# Altium PCB BABA03A.PcbDoc (part 2 of 2)
Units mm, origin at the board's own origin, x right, y up, seen from the top; angles counter-clockwise.
Board outline 201.01 x 71.02 mm, 2 copper layers (Top Layer, Bottom Layer); 178 components, 141 nets, 590 pads, 257 vias.
Unrouted connection lines stored in the file: 7.
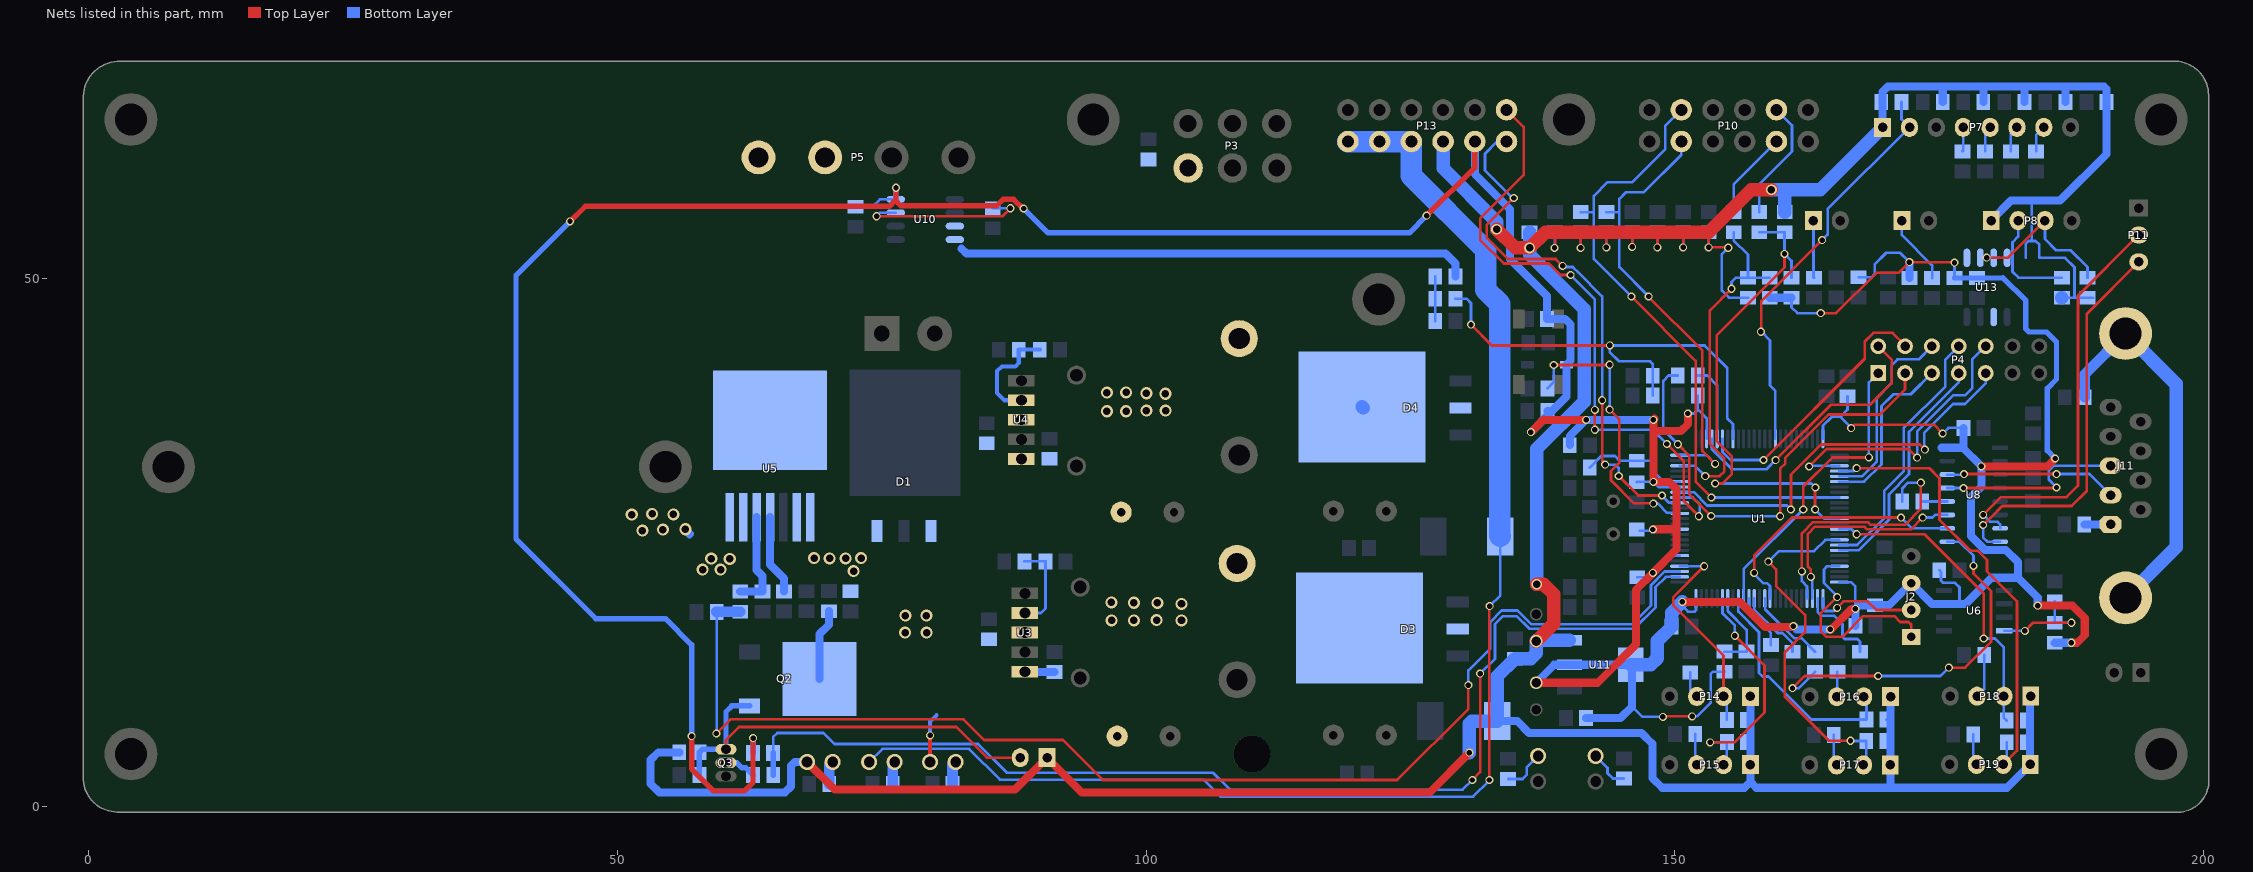
[diagram p2: the nets of this part, all layers, seen from the top]

## Via types
v1: diameter 0.762, hole 0.508, Top Layer to Bottom Layer, tented both sides, 213 vias
v2: diameter 1.143, hole 0.711, Top Layer to Bottom Layer, tented both sides, 35 vias
v3: diameter 1.016, hole 0.711, Top Layer to Bottom Layer, tented both sides, 9 vias

## Nets (pads, with @x,y where several pads share a name; then routed paths per layer and width w, separated by ;. In a path a pad name is that pad's centre, name@x,y a point inside that pad or via, vN(x,y) a via of type N, cw(c..) or ccw(c..) an arc to the next point about the centre after c; other vN are vias at no path point) (continued)
NetC51_2: C51.2 R41.1 U1.20 | length 10.4
  Bottom Layer w0.254: R41.1@141.971,32.094 143.049,33.172 144.353,33.172 144.795,32.73 C51.2@146.406,32.73 147.813,32.73 148.082,32.461 148.082,31.602 148.93,30.754 U1.20@150.463,30.754
NetD2_1: D2.1 R22.1 | length 4.2
  Bottom Layer w0.254: R22.1@134.239,2.642 135.611,2.642 135.992,3.023 135.992,3.719 D2.1@137.084,4.811
NetD3_2: D3.2 L1.1 U3.3
  other v2: 96.749,17.628 98.857,17.628 103.353,17.628 100.99,17.653 103.353,19.202 101.067,19.279 98.857,19.304 96.723,19.329
NetD4_2: D4.2 L2.1 U4.3 | length 0.1
  Bottom Layer w1.27: D4.2@120.421,37.823 D4.2@120.525,37.719
  other v2: 96.291,37.414 98.12,37.414 100.025,37.465 101.854,37.465 101.829,39.065 100.025,39.116 96.291,39.167 98.12,39.192
NetD5_2: D5.2 R16.2 | length 2.2
  Bottom Layer w1: R16.2@81.697,2.184 81.697,3.947 D5.2@81.991,4.242
NetD6_1: D6.1 R17.1 | length 3.9
  Bottom Layer w0.254: D6.1@142.519,4.811 143.637,3.693 143.637,3.175 144.14,2.672 R17.1@145.186,2.672
NetD9_2: D9.2 R24.2 | length 2.2
  Bottom Layer w1: R24.2@70.038,2.159 70.038,3.922 D9.2@70.358,4.242
NetD11_2: D11.2 R28.2 | length 2.1
  Bottom Layer w1: R28.2@76.032,2.184 76.032,4.049 D11.2@76.225,4.242
NetJ11_1: J11.1 R52.2 | length 2.5
  Bottom Layer w0.762: R52.2@188.732,26.708 J11.1@191.22,26.708
NetJ11_2: J11.2 U8.14 | length 16.4
  Top Layer w0.254: v1(177.358,31.471) v1(186.106,31.471) v1@186.258,31.471
  Bottom Layer w0.254: U8.14@175.772,31.42 177.307,31.42 v1(177.358,31.471) ; v1(186.106,31.471) 189.23,31.471 J11.2@191.22,29.481
NetJ11_3: J11.3 U8.13 | length 18.3
  Top Layer w0.254: v1(177.307,30.15) 186.055,30.15 v1(186.106,30.201)
  Bottom Layer w0.254: U8.13@175.772,30.15 v1(177.307,30.15) ; v1(186.106,30.201) 185.369,30.937 185.369,31.826 185.797,32.254 J11.3@191.22,32.254
NetJ11_10: J11.10 J11.11 R63.2 | length 36.6
  Bottom Layer w1.016: R63.2@188.783,38.735 188.783,40.908 J11.11@192.638,44.763
  Bottom Layer w1.27: J11.10@192.638,19.765 197.409,24.536 197.409,39.992 J11.11@192.638,44.763
NetP6_1: P6.1 R69.1 | length 5.4
  Bottom Layer w0.254: P6.1@163.119,55.448 163.119,50.099 R69.1@163.17,50.048
NetP7_4: P7.4 R70.1 | length 2.3
  Bottom Layer w0.254: R70.1@177.216,61.986 177.282,62.052 P7.4@177.282,64.262
NetP7_5: P7.5 R71.1 | length 2.5
  Bottom Layer w0.254: R71.1@179.349,61.986 179.349,63.79 P7.5@179.822,64.262
NetP7_6: P7.6 R72.1 | length 2.5
  Bottom Layer w0.254: R72.1@181.788,61.986 181.788,63.688 P7.6@182.362,64.262
NetP7_7: P7.7 R73.1 | length 2.6
  Bottom Layer w0.254: R73.1@184.175,61.986 184.175,63.536 P7.7@184.902,64.262
NetP8_2: P8.2 R54.2 U13.6 | length 10
  Bottom Layer w0.254: P8.2@182.474,55.448 182.474,53.924 181.933,53.384 181.933,50.605 182.49,50.048 R54.2@186.607,50.048
NetP8_3: P8.3 R56.2 U13.5 | length 16
  Top Layer w0.254: v1(179.502,51.943) 181.508,51.943 P8.3@185.014,55.448
  Bottom Layer w0.254: v1(179.502,51.943) 179.521,51.924 180.663,51.924 ; P8.3@185.014,55.448 185.014,53.696 186.08,52.629 187.452,52.629 189.027,51.054 R56.2@189.027,50.048
NetP9_1: P9.1 R74.1 | length 6.6
  Bottom Layer w0.254: P9.1@171.475,55.448 171.475,54.077 174.338,51.214 R74.1@174.338,50.016
NetP10_5: P10.5 R76.1 | length 8.3
  Bottom Layer w0.254: R76.1@155.575,56.246 155.575,58.872 P10.5@159.619,62.916
NetP10_8: P10.8 R77.2 | length 11.6
  Bottom Layer w0.254: R77.2@157.988,56.246 157.988,58.877 161.087,61.976 161.087,64.448 P10.8@159.619,65.916
NetP11_2: P11.2 U8.7 | length 38.5
  Top Layer w0.254: v1(179.172,27.61) 180.848,29.286 187.046,29.286 188.138,30.378 188.138,48.336 P11.2@193.878,54.077
  Bottom Layer w0.254: v1(179.172,27.61) 179.182,27.61 179.817,26.975 180.499,26.975 180.772,26.702 U8.7@180.772,26.34
NetP11_3: P11.3 U8.8 | length 37.8
  Top Layer w0.254: v1(179.172,26.65) 179.446,26.924 179.456,26.924 179.857,27.326 179.857,27.336 180.97,28.448 187.53,28.448 188.976,29.894 188.976,46.634 P11.3@193.878,51.537
  Bottom Layer w0.254: v1(179.172,26.65) 179.172,25.476 179.578,25.07 U8.8@180.772,25.07
NetP14_3: P14.3 R78.1 | length 2.5
  Bottom Layer w0.254: R78.1@151.46,12.715 151.46,11.049 P14.3@152.07,10.439
NetP15_3: P15.3 R80.1 | length 3
  Bottom Layer w0.254: R80.1@151.928,6.883 151.928,4.13 P15.3@152.07,3.988
NetP16_3: P16.3 R82.1 | length 2.4
  Bottom Layer w0.254: P16.3@165.329,10.414 165.379,10.465 R82.1@165.379,12.766
NetP17_3: P17.3 R84.1 | length 3
  Bottom Layer w0.254: R84.1@165.034,6.807 165.034,4.232 P17.3@165.303,3.962
NetP18_3: P18.3 R86.1 | length 4.2
  Bottom Layer w0.254: P18.3@178.587,10.465 179.258,11.135 R86.1@179.258,14.376
NetP19_3: P19.3 R88.1 | length 2.9
  Bottom Layer w0.254: R88.1@178.227,6.833 178.227,4.323 P19.3@178.537,4.013
NetQ2_3: Q2.3 R23.1 | length 6.8
  Bottom Layer w0.762: Q2.3@69.113,12.09 69.113,16.332 70.002,17.221 R23.1@70.002,18.506
NetQ3_2: Q3.2 R61.1 | length 3
  Bottom Layer w0.508: Q3.2@60.274,4.166 61.316,4.166 61.798,3.683 62.148,3.683 R61.1@62.834,2.997
NetR1_2: R1.2 U10.7 | length 16.6
  Top Layer w0.254: v1(74.524,55.855) 86.436,55.855 87.173,56.591 v1(87.173,56.612)
  Bottom Layer w0.254: v1(74.524,55.855) 74.854,56.185 U10.7@76.321,56.185 ; R1.2@85.496,56.612 v1(87.173,56.612)
NetR2_2: R2.2 R5.1 R7.1 | length 4.2
  Bottom Layer w0.254: R2.2@127.356,50.165 R5.1@127.356,48.057 127.356,45.954 R7.1@127.361,45.949
NetR13_2: R13.2 R14.1 U3.2 | length 8.6
  Bottom Layer w0.254: R14.1@88.494,23.216 R13.2@90.49,23.216 90.49,18.771 90.054,18.335 U3.2@88.544,18.335
NetR15_2: R15.2 R18.1 U4.2 | length 10.3
  Bottom Layer w0.381: U4.2@88.214,38.451 86.593,38.451 85.903,39.141 85.903,41.199 86.36,41.656 87.63,41.656 87.96,41.986 R18.1@87.96,43.231 R15.2@89.957,43.231
NetR20_1: R20.1 U8.12 | length 2.4
  Bottom Layer w0.254: R20.1@173.416,28.88 U8.12@175.772,28.88
NetR25_2: R25.2 R39.1 U1.94 | length 7.8
  Bottom Layer w0.254: R39.1@154.711,14.681 R25.2@156.794,14.681 156.794,16.739 155.013,18.519 U1.94@155.013,19.704
NetR26_2: R26.2 R27.2 U5.5 | length 9.4
  Bottom Layer w0.762: R26.2@61.62,20.356 R27.2@63.729,20.356 63.729,21.844 63.17,22.403 U5.5@63.17,27.404
NetR37_1: R37.1 U1.30 | length 7.3
  Bottom Layer w0.254: R37.1@152.182,40.792 153.086,40.792 154.013,39.865 U1.30@154.013,34.804
NetR58_1: R58.1 U8.9 | length 35.2
  Top Layer w0.254: v1(161.138,11.227) 162.281,12.37 v1(169.24,12.37) ; v1(175.92,13.157) 177.47,13.157 179.908,15.596 179.908,20.396 178.257,22.047 v1(178.257,22.784)
  Bottom Layer w0.254: v1(161.138,11.227) 161.732,11.227 R58.1@163.271,12.766 ; v1(169.24,12.37) 175.133,12.37 v1(175.92,13.157) ; U8.9@175.772,25.07 176.936,25.07 178.257,23.749 v1(178.257,22.784)
NetR89_2: R89.2 R90.1 U6.8 | length 10.2
  Top Layer w0.254: v1(183.109,16.649) 183.869,17.409 v1(187.503,17.409)
  Bottom Layer w0.254: U6.8@181.165,16.649 v1(183.109,16.649) ; R90.1@185.939,19.421 R89.2@185.939,17.409 v1(187.503,17.409)
NetR91_1: R91.1 U1.90 | length 5.3
  Bottom Layer w0.254: U1.90@157.013,19.704 157.013,18.526 159.09,16.45 R91.1@159.09,15.301
NetR92_1: R92.1 U1.89 | length 6.8
  Bottom Layer w0.254: U1.89@157.513,19.704 157.513,18.661 159.741,16.434 160.198,16.434 161.138,15.494 R92.1@161.138,14.666
NetR93_1: R93.1 U1.77 | length 8.1
  Bottom Layer w0.254: U1.77@163.513,19.704 163.513,18.427 163.855,18.085 165.049,18.085 165.862,17.272 165.862,16.078 166.065,15.875 167.259,15.875 167.513,15.621 R93.1@167.513,14.666
PC1: P13.6 U1.16 | length 51
  Top Layer w0.254: v1(134.772,57.582) 134.764,57.582 132.207,55.025 132.207,53.823 134.214,51.816 138.735,51.816 v1(139.395,51.156) ; v1(143.129,38.451) 143.129,32.647 v1(143.421,32.355) ; v1(144.704,31.293) 146.558,29.439 v1(148.793,29.439)
  Bottom Layer w0.254: P13.6@134.092,62.916 133.205,62.916 132.055,61.765 132.055,60.173 134.645,57.582 v1(134.772,57.582) ; v1(139.395,51.156) 139.497,51.054 140.358,51.054 140.434,50.978 140.441,50.978 140.843,50.576 140.843,50.569 143.129,48.283 v1(143.129,38.451) ; v1(143.421,32.355) 144.384,32.355 144.704,32.036 v1(144.704,31.293) ; v1(148.793,29.439) 149.478,28.754 U1.16@150.463,28.754
PC2: P13.7 U1.17 | length 59
  Top Layer w0.254: P13.7@134.092,65.916 135.712,64.296 135.712,59.741 131.597,55.626 131.597,53.619 133.833,51.384 138.1,51.384 139.192,50.292 v1(140.157,50.292) ; v1(142.443,35.662) v1(142.443,37.541) ; v1(149.25,34.315) 150.851,32.715 150.851,28.905 v1(152.273,27.483)
  Bottom Layer w0.254: v1(140.157,50.292) 140.157,50.277 142.443,47.991 v1(142.443,37.541) ; v1(142.443,35.662) 147.904,35.662 v1(149.25,34.315) ; U1.17@150.463,29.254 151.694,29.254 152.374,28.574 152.374,27.584 v1(152.273,27.483)
PG_L: R38.1 R64.1 R76.2 U1.23 | length 32.8
  Top Layer w0.254: v1(152.883,31.267) 154.229,31.267 154.686,31.725 154.686,32.964 153.314,34.336 153.314,46.939 v1(155.372,48.997)
  Bottom Layer w0.254: U1.23@150.463,32.254 151.896,32.254 v1(152.883,31.267) ; v1(155.372,48.997) 155.372,49.62 155.8,50.048 R38.1@156.921,50.048 ; R76.2@155.575,54.346 155.575,53.576 156.921,52.23 R38.1@156.921,50.048 ; R64.1@158.979,50.048 R38.1@156.921,50.048
PG_R: R42.2 R67.2 R77.1 U1.63 | length 47.4
  Top Layer w0.254: v1(153.822,30.582) 154.508,30.582 155.393,31.466 155.393,33.151 153.975,34.569 153.975,44.609 160.376,51.01 v1(160.376,52.299) ; v1(163.271,28.118) 163.271,30.175 v1(163.297,30.201)
  Bottom Layer w0.254: v1(153.822,30.582) 162.916,30.582 v1(163.297,30.201) ; R77.1@157.988,54.346 R42.2@160.401,54.346 160.376,54.32 v1(160.376,52.299) 161.036,51.638 R67.2@161.036,50.048 ; v1(163.271,28.118) 164.135,27.254 U1.63@165.563,27.254
PROFET_IN: R60.2 R61.2 U1.2 | length 109.5
  Top Layer w0.254: v1(130.861,2.54) 131.597,3.277 v1(131.597,12.598)
  Bottom Layer w0.254: R60.2@64.729,5.105 64.729,6.588 65.126,6.985 69.494,6.985 70.536,5.944 84.125,5.944 86.843,3.226 106.35,3.226 107.95,1.626 129.946,1.626 v1(130.861,2.54) ; v1(131.597,12.598) 132.994,13.995 132.994,17.272 133.756,18.034 135.052,18.034 136.246,16.84 146.164,16.84 148.184,18.859 148.184,20.776 149.162,21.754 U1.2@150.463,21.754
  Bottom Layer w0.508: R60.2@64.729,5.105 64.734,5.1 R61.2@64.734,2.997
PROFET_IS: C34.1 R26.1 U1.3 | length 121.8
  Top Layer w0.254: v1(59.36,6.934) 60.706,8.28 82.728,8.28 84.684,6.325 92.126,6.325 95.91,2.54 123.749,2.54 130.48,9.271 v1(130.48,11.506)
  Bottom Layer w0.254: v1(59.36,6.934) 59.395,6.97 C34.1@59.395,18.44 ; v1(130.48,11.506) 130.48,12.903 132.563,14.986 132.563,17.501 133.629,18.567 135.129,18.567 136.424,17.272 145.986,17.272 147.752,19.038 147.752,20.955 149.051,22.254 U1.3@150.463,22.254
  Bottom Layer w1: C34.1@59.36,18.456 R26.1@61.62,18.456
RELAY_IN: C7.1 C15.2 C16.2 C17.1 C36.2 D1.1 D1.3 P3.1 P5.4 U4.5 U5.1 U5.2 U5.6 U5.7
  other v2: 72.339,22.301 58.064,22.428 59.766,22.428 60.63,23.444 58.877,23.47 70.079,23.495 71.577,23.495 68.605,23.52 73.05,23.52
RELY: P12.2 Q2.1 Q3.3 R59.2 R62.1 | length 41.2
  Top Layer w0.254: Q3.3@60.274,5.436 60.274,6.325 61.493,7.544 82.067,7.544 84.963,4.648 P12.2@88.104,4.648
  Bottom Layer w0.508: R62.1@57.757,3.023 R59.2@57.757,5.156 58.036,5.436 Q3.3@60.274,5.436 60.274,8.992 60.833,9.55 Q2.1@62.509,9.55
RELY1: P4.9 U1.18 | length 38.9
  Top Layer w0.254: v1(160.985,28.118) 160.985,31.424 163.825,34.265 173.177,34.265 v1(173.66,33.782)
  Bottom Layer w0.254: U1.18@150.463,29.754 151.805,29.754 153.06,28.499 160.604,28.499 v1(160.985,28.118) ; v1(173.66,33.782) 173.584,33.858 173.584,35.357 176.327,38.1 177.444,38.1 179.4,40.056 P4.9@179.4,41.021
RELY2: P7.2 R36.2 U1.41 | length 38.5
  Top Layer w0.254: v1(158.14,44.933) 158.191,44.983 158.191,47.854 v1(163.932,53.594)
  Bottom Layer w0.254: v1@158.191,44.933 159.013,44.11 159.013,39.842 159.513,39.342 U1.41@159.513,34.804 ; v1(163.932,53.594) 164.465,54.127 164.465,56.525 P7.2@172.202,64.262 171.435,65.029 R36.2@171.435,66.65
RESET: R35.1 U1.14 | length 27.2
  Top Layer w0.254: v1(138.557,41.783) 143.815,41.783 v1(143.84,41.808) ; v1(143.84,37.567) 144.739,36.667 144.739,32.522 143.967,31.75 143.967,30.886 146.152,28.702 147.955,28.702 v1(147.98,28.677)
  Bottom Layer w0.254: R35.1@137.968,39.573 138.557,40.162 v1(138.557,41.783) ; v1(143.84,37.567) v1(143.84,41.808) ; v1(147.98,28.677) 148.399,28.677 149.276,27.799 150.418,27.799 U1.14@150.463,27.754
SPI1_MISO: P4.4 U1.31 | length 25.4
  Top Layer w0.254: v1(158.394,32.799) 167.97,42.375 167.97,44.018 168.783,44.831 170.613,44.831 171.78,43.664 P4.4@171.78,43.561
  Bottom Layer w0.254: U1.31@154.513,34.804 154.513,33.574 155.288,32.799 v1(158.394,32.799)
SPI1_MOSI: P4.1 U1.91 | length 28.6
  Top Layer w0.254: v1(162.154,28.118) 162.154,30.302 164.897,33.045 v1(168.351,33.045)
  Bottom Layer w0.254: U1.91@156.513,19.704 156.513,22.478 v1(162.154,28.118) ; v1(168.351,33.045) 168.351,40.132 P4.1@169.24,41.021
SPI1_NSS: P4.2 U1.29 | length 26.2
  Top Layer w0.254: v1(159.537,32.791) 164.77,38.024 168.453,38.024 170.51,40.081 170.51,42.291 P4.2@169.24,43.561
  Bottom Layer w0.254: U1.29@153.559,34.804 U1.29@153.513,34.804 153.513,33.807 155.393,31.928 158.674,31.928 v1(159.537,32.791)
SPI1_SCK: P4.3 R37.2 | length 44
  Top Layer w0.254: v1(150.292,34.29) 151.359,33.223 151.359,29.591 v1(153.441,27.508) ; v1(159.969,27.483) 159.969,31.98 160.452,32.463 160.452,33.02 164.541,37.109 169.414,37.109 171.78,39.476 P4.3@171.78,41.021
  Bottom Layer w0.254: R37.2@150.282,40.792 149.428,40.792 148.92,40.284 148.92,35.662 v1(150.292,34.29) ; v1(153.441,27.508) 153.467,27.483 v1(159.969,27.483)
SV_L: P10.2 R49.1 U1.25 | length 42.6
  Top Layer w0.254: v1(147.523,48.26) 147.523,48.235 152.603,43.155 152.603,33.655 v1(153.822,32.436)
  Bottom Layer w0.254: R49.1@143.535,56.246 144.739,56.246 144.755,56.261 ; v1(147.523,48.26) 147.523,48.285 144.755,51.054 144.755,56.261 ; U1.25@150.463,33.254 153.004,33.254 v1(153.822,32.436) ; P10.2@150.619,62.916 150.619,61.671 147.063,58.115 145.364,58.115 144.755,57.506 144.755,56.261
SV_R: P10.11 R53.2 U1.59 | length 59.4
  Top Layer w0.254: v1(145.898,48.26) 151.978,42.18 151.978,30.75 v1(153.467,29.261)
  Bottom Layer w0.254: R53.2@141.112,56.246 142.342,56.246 ; v1(145.898,48.26) 142.342,51.816 142.342,56.246 ; P10.11@150.619,65.916 149.098,64.395 149.098,62.179 145.974,59.055 143.612,59.055 142.342,57.785 142.342,56.246 ; v1(153.467,29.261) 153.473,29.254 U1.59@165.563,29.254
SYS_SWCLK: J2.2 U1.76 | length 10.2
  Top Layer w0.254: v1(165.354,18.821) 165.964,19.431 168.25,19.431 169.062,18.618 J2.2@172.364,18.618
  Bottom Layer w0.254: U1.76@164.013,19.704 164.013,18.689 164.186,18.517 165.049,18.517 v1(165.354,18.821)
SYS_SWDIO: J2.1 U1.72 | length 19.6
  Top Layer w0.254: v1(165.354,19.837) 163.805,18.288 163.805,16.637 164.363,16.078 165.862,16.078 167.818,18.034 170.764,18.034 171.323,17.475 172.11,17.475 172.364,17.221 J2.1@172.364,16.078
  Bottom Layer w0.254: v1(165.354,19.837) 165.354,19.939 164.109,21.184 164.109,22.454 164.41,22.754 U1.72@165.563,22.754
T_SENSE: P4.10 U1.53 | length 28
  Top Layer w0.254: v1(162.712,32.182) 164.363,33.833 172.11,33.833 v1(172.923,33.02)
  Bottom Layer w0.254: v1(162.712,32.182) 162.785,32.254 U1.53@165.563,32.254 ; v1(172.923,33.02) 172.923,35.509 176.327,38.913 177.47,38.913 178.13,39.573 178.13,42.291 P4.10@179.4,43.561
TRIG1: P14.2 R75.1 U1.4 | length 20.2
  Top Layer w0.254: v1(152.781,22.754) 149.86,19.833 149.86,19.05 154.61,14.3 P14.2@154.61,10.439
  Bottom Layer w0.254: U1.4@150.463,22.754 v1(152.781,22.754) ; P14.2@154.61,10.439 154.93,10.119 R75.1@154.93,8.23
TRIG2: P15.2 R79.1 U1.95 | length 22.6
  Top Layer w0.254: v1(153.34,6.096) 155.656,6.096 158.496,8.936 158.496,13.36 v1(155.677,16.18)
  Bottom Layer w0.254: v1(153.34,6.096) 153.365,6.121 R79.1@154.93,6.121 154.93,4.308 P15.2@154.61,3.988 ; U1.95@154.513,19.704 154.513,18.308 155.677,17.145 v1(155.677,16.18)
TRIG3: P16.2 R81.1 U1.92 | length 22.1
  Bottom Layer w0.254: U1.92@156.013,19.704 156.013,18.459 157.963,16.51 157.963,12.649 158.293,12.319 158.852,12.319 162.916,8.255 R81.1@168.128,8.255 168.128,10.155 P16.2@167.869,10.414
TRIG4: P17.2 R83.1 U1.67 | length 34.4
  Top Layer w0.254: v1(158.852,23.19) 159.589,22.453 159.589,20.895 162.331,18.153 162.331,16.52 160.401,14.59 160.401,10.414 164.567,6.248 v1(166.624,6.248)
  Bottom Layer w0.254: v1(158.852,23.19) 159.847,24.186 163.168,24.186 164.236,25.254 U1.67@165.563,25.254 ; v1(166.624,6.248) 166.649,6.223 R83.1@168.112,6.223 168.112,4.232 P17.2@167.843,3.962
TRIG5: P18.2 R85.1 U1.65 | length 29.7
  Top Layer w0.254: v1(167.208,25.781) 173.609,25.781 179.222,20.168 v1(179.222,15.926)
  Bottom Layer w0.254: U1.65@165.563,26.254 166.735,26.254 v1(167.208,25.781) ; v1(179.222,15.926) 180.289,15.926 181.127,15.088 P18.2@181.127,10.465 181.127,8.423 R85.1@181.397,8.153
TRIG6: P19.2 R87.1 U1.54 | length 43.2
  Top Layer w0.254: v1(167.208,32.029) 174.066,32.029 175.031,31.064 175.031,27.142 177.947,24.226 178.639,24.226 179.527,23.339 179.527,22.276 182.372,19.431 182.372,5.309 P19.2@181.077,4.013
  Bottom Layer w0.254: U1.54@165.563,31.754 166.933,31.754 v1(167.208,32.029) ; P19.2@181.077,4.013 181.397,4.333 R87.1@181.397,6.113
U_SENSE: C3.2 C4.2 R5.2 U1.33 | length 44.7
  Top Layer w0.254: v1(130.734,45.598) 132.695,43.637 v1(143.866,43.637)
  Bottom Layer w0.254: R5.2@129.256,48.057 130.302,48.057 130.734,47.625 v1(130.734,45.598) ; C4.2@147.914,38.887 C3.2@147.914,40.767 147.914,41.885 147.66,42.139 144.729,42.139 143.84,43.028 143.84,43.637 152.832,43.637 154.965,41.504 154.965,36.743 155.513,36.195 U1.33@155.513,34.804
UART4_RX: R20.2 U1.79 | length 24.5
  Top Layer w0.254: v1(162.013,22.276) 162.013,25.845 163.092,26.924 168.275,26.924 168.529,26.67 171.755,26.67 173.279,28.194 v1(173.279,30.658)
  Bottom Layer w0.254: v1(162.013,22.276) 162.013,21.349 162.513,20.849 U1.79@162.513,19.704 ; R20.2@171.516,28.88 171.516,30.114 172.06,30.658 v1(173.279,30.658)
UART4_TX: U1.78 U8.11 | length 20.4
  Top Layer w0.254: v1(162.865,21.754) 162.865,22.428 162.585,22.708 162.585,25.806 163.271,26.492 167.919,26.492 168.173,26.238 172.329,26.238 v1(173.446,27.356)
  Bottom Layer w0.254: v1(162.865,21.754) 163.013,21.606 U1.78@163.013,19.704 ; v1(173.446,27.356) 174.371,27.356 174.625,27.61 U8.11@175.772,27.61
USART1_RX: P4.7 U1.69 | length 22.5
  Bottom Layer w0.254: U1.69@165.563,24.254 167.359,24.254 170.256,27.152 170.256,29.559 172.161,31.464 172.161,35.458 176.86,40.157 P4.7@176.86,41.021
USART1_TX: P4.8 U1.68 | length 24.5
  Bottom Layer w0.254: U1.68@165.563,24.754 167.248,24.754 169.824,27.33 169.824,29.896 171.653,31.725 171.653,35.814 175.59,39.751 175.59,42.291 P4.8@176.86,43.561
USART2_RX: R58.2 U1.87 | length 7.4
  Bottom Layer w0.254: U1.87@158.513,19.704 158.559,19.659 158.559,18.684 161.291,15.951 161.986,15.951 R58.2@163.271,14.666
USART2_TX: U1.86 U8.10 | length 25.1
  Top Layer w0.254: v1(157.505,22.123) 157.505,23.774 161.087,27.356 v1(171.399,27.356)
  Bottom Layer w0.254: v1(157.505,22.123) 157.505,22 158.373,21.133 158.75,21.133 159.013,20.869 U1.86@159.013,19.704 ; v1(171.399,27.356) 172.415,26.34 U8.10@175.772,26.34
USART3_RX: P4.5 U1.56 | length 16.2
  Bottom Layer w0.254: U1.56@165.563,30.754 167.914,30.754 169.545,32.385 169.545,37.897 170.668,39.02 172.319,39.02 P4.5@174.32,41.021
USART3_TX: P4.6 U1.55 | length 18.4
  Bottom Layer w0.254: U1.55@165.563,31.254 167.703,31.254 169.113,32.664 169.113,38.684 170.51,40.081 170.51,41.758 171.069,42.316 173.076,42.316 P4.6@174.32,43.561
VCC_3V3: C1.1 C2.1 C8.2 C9.2 C20.1 C25.1 C26.1 C27.1 C29.2 C30.1 C38.2 C47.1 C48.1 C52.1 D8.2 J2.3 P13.5 R30.2 R39.2 R40.2 R46.2 R47.2 R50.2 R51.2 R60.1 R64.2 R67.1 R89.1 U1.6 U1.11 U1.19 U1.28 U1.50 U1.75 U1.100 U6.3 U8.16 U10.8 U11.2 U11.4 U13.2 | length 491.6
  Top Layer w0.254: v1(148.869,8.509) 148.92,8.56 v1(151.638,8.56) ; v1(163.805,46.685) 165.252,46.685 169.062,50.495 171.171,50.495 v1(172.187,51.511) 176.403,51.511 v1(176.454,51.46) ; v1(166.68,35.814) 167.011,36.144 174.498,36.144 v1(175.336,35.306)
  Top Layer w0.508: v1(45.517,55.372) 45.542,55.372 46.965,56.794 75.717,56.794 76.352,57.429 ; v1(57.028,6.679) 57.028,3.576 59.106,1.499 62.027,1.499 62.834,2.305 62.834,6.496 v1(62.84,6.502) ; v1(76.352,58.547) 76.352,57.429 ; v1(88.417,56.591) 88.343,56.591 87.479,57.455 86.487,57.455 85.877,56.845 76.784,56.845 76.352,57.277 76.352,57.429 ; v1(126.543,55.905) 131.092,60.455 P13.5@131.092,62.916
  Top Layer w0.762: v1(136.398,35.433) 137.592,36.627 137.617,36.601 v1(141.615,36.601) ; C30.1@136.896,11.735 142.712,11.735 146.329,15.352 146.329,20.523 v1(147.93,22.123) 150.165,24.359 150.165,26.254 ; v1(147.93,26.223) 147.961,26.254 150.165,26.254 ; v1@148.082,36.703 v1(147.98,36.601) 147.98,35.509 ; v1(150.724,19.38) 156.159,19.38 158.521,17.018 161.138,17.018 v1(161.214,17.094) ; v1(151.244,37.196) 151.244,36.182 150.597,35.535 148.006,35.535 147.98,35.509 ; v1(164.694,16.789) 164.798,16.789 166.728,18.72 v1(167.081,18.72) ; v1(178.994,32.207) 185.242,32.207 v1(185.979,32.944) ; v1(184.328,19.025) 187.615,19.025 188.773,17.866 188.773,16.231 188.062,15.519 v1(187.503,15.519) ; 147.98,35.509 v1(147.98,30.734) 149.482,30.734 150.165,30.051 150.165,26.254
  Bottom Layer w0.254: C9.2@72.517,56.754 74.127,56.754 74.828,57.455 U10.8@76.321,57.455 ; U11.4@145.841,13.437 U11.4@145.974,13.304 ; 145.974,9.5 146.964,8.509 v1(148.869,8.509) ; C52.1@146.406,30.704 146.435,30.734 v1(147.98,30.734) 148.46,30.254 U1.19@150.463,30.254 ; C20.1@146.456,21.702 147.508,21.702 v1(147.93,22.123) 149.56,23.754 U1.6@150.463,23.754 ; C27.1@146.71,26.121 v1@147.889,26.121 ; v1(147.93,26.223) 147.961,26.254 U1.11@150.463,26.254 ; v1(150.724,19.38) 150.724,18.989 151.257,18.456 151.872,18.456 152.013,18.597 U1.100@152.013,19.704 ; v1(151.244,37.196) 151.824,37.196 152.182,37.553 152.182,37.582 ; v1(151.638,8.56) 152.121,8.56 153.391,9.83 153.391,12.545 153.627,12.781 R39.2@154.711,12.781 ; C1.1@152.182,38.887 152.182,37.582 ; U1.28@153.013,34.804 153.013,36.75 152.182,37.582 ; R67.1@161.036,48.148 161.036,47.244 161.595,46.685 v1(163.805,46.685) ; U1.50@164.013,34.804 164.013,36.048 164.846,36.881 165.659,36.881 ; U1.75@165.563,21.254 166.68,21.254 167.081,20.853 v1@167.081,18.745 ; C2.1@166.345,38.826 166.345,37.567 165.659,36.881 ; v1(166.68,35.814) 166.68,35.859 165.659,36.881 ; R46.2@167.386,50.074 168.615,50.074 168.91,50.368 168.91,51.308 170.002,52.4 171.298,52.4 v1(172.187,51.511) ; C8.2@175.021,22.377 175.184,22.215 175.184,21.387 175.392,21.178 176.51,21.178 176.921,20.767 176.921,19.467 176.644,19.189 ; v1(175.336,35.306) 175.87,35.839 C38.2@177.307,35.839 ; R51.2@176.454,50.031 v1(176.454,51.46)
  Bottom Layer w0.508: v1(45.517,55.372) 40.411,50.267 40.411,25.349 47.955,17.805 54.538,17.805 57.028,15.315 v1(57.028,6.679) ; R60.1@62.829,5.105 62.84,5.116 v1(62.84,6.502) ; U10.8@76.321,57.455 76.321,58.516 v1(76.352,58.547) ; v1(88.417,56.591) 90.729,54.28 124.917,54.28 v1(126.543,55.905) ; R51.2@176.454,50.031 R51.2@176.472,50.013 R50.2@178.58,50.013 181.026,50.013 181.044,50.031 183.203,47.872 183.203,45.194 183.49,44.907 185.166,44.907 186.106,43.967 186.106,40.437 185.242,39.573 185.242,33.68 v1(185.979,32.944)
  Bottom Layer w0.762: P13.5@131.092,62.916 131.092,59.84 134.417,56.515 134.417,51.816 137.919,48.314 C47.1@137.919,46.126 139.64,46.126 140.157,45.609 140.157,42.198 D8.2@139.768,41.808 139.768,38.803 R30.2@138.405,37.44 ; v1(136.398,35.433) R30.2@138.405,37.44 ; C30.1@136.896,11.735 138.598,13.437 U11.2@140.041,13.437 U11.4@145.841,13.437 ; R30.2@137.958,37.44 R30.2@138.405,37.44 ; R40.2@140.076,34.202 140.076,35.062 v1(141.615,36.601) v1(147.98,36.601) ; C29.2@141.615,8.407 144.882,8.407 145.974,9.5 U11.4@145.974,13.304 ; R64.2@158.979,48.148 R67.1@161.036,48.148 ; v1(161.214,17.094) 161.519,16.789 v1(164.694,16.789) ; C48.1@167.086,17.12 167.081,17.125 v1(167.081,18.72) 167.081,18.745 167.401,19.065 C25.1@168.935,19.065 170.271,19.065 J2.3@172.364,21.158 174.333,19.189 U6.3@175.451,19.189 176.644,19.189 177.482,19.189 179.959,21.666 182.448,21.666 ; v1(172.187,51.511) 172.212,51.486 R47.2@172.212,50.023 ; U8.16@175.235,33.96 U8.16@175.772,33.96 177.241,33.96 ; C38.2@177.307,35.839 177.307,34.026 177.241,33.96 ; v1(184.328,19.025) 184.328,19.787 182.448,21.666 ; R89.1@185.939,15.509 185.95,15.519 v1(187.503,15.519) ; 177.241,33.96 v1(178.994,32.207) 178.994,30.277 178.003,29.286 178.003,25.629 179.346,24.286 181.302,24.286 182.448,23.139 182.448,21.666
  Bottom Layer w1.27: U11.4@145.841,13.437 147.726,13.437 148.361,14.072 148.361,15.702 C26.1@149.702,17.043 149.702,18.359 v1(150.724,19.38)
VCC_5V: C31.1 C32.2 D9.1 P7.1 P8.1 P12.1 P13.4 P14.1 P15.1 P16.1 P17.1 P18.1 P19.1 R9.1 R29.1 R31.1 R32.1 R33.1 R34.1 R36.1 R38.2 R42.1 R43.2 R44.1 R45.2 R48.1 R49.2 R53.1 R54.1 R55.2 R56.1 R57.1 R59.1 R75.2 R79.2 R81.2 R83.2 R85.2 R87.2 U11.3 U13.7 U13.8 | length 384.7
  Top Layer w0.254: v1(138.633,52.857) 138.684,52.908 138.684,54.356 ; v1(141.097,52.857) 141.097,54.331 141.122,54.356 ; v1(143.535,52.908) 143.535,54.356 ; v1(145.974,52.959) 145.974,54.356 ; v1(148.361,52.908) 148.361,54.356 ; 150.782,54.356 150.8,54.338 v1(150.8,52.908) ; 153.203,54.356 v1(153.203,52.908) 154.936,52.908 155.06,52.784 v1(155.06,52.873)
  Top Layer w0.762: D9.1@67.945,4.242 70.561,1.626 87.622,1.626 P12.1@90.644,4.648 93.921,1.372 126.822,1.372 v1(130.581,5.131)
  Top Layer w1.27: v3(133.147,54.635) 134.925,52.857 v3(136.271,52.857) 137.77,54.356 138.684,54.356 141.122,54.356 143.535,54.356 145.974,54.356 148.361,54.356 150.782,54.356 153.203,54.356 153.213,54.346 157.236,58.369 v3(159.142,58.369) ; C31.1@136.896,15.672 138.557,17.333 138.557,20.091 137.592,21.057 v3(136.957,21.057)
  Bottom Layer w0.254: v1(138.633,52.857) 138.659,52.883 R55.2@138.659,54.346 ; v1(141.097,52.857) 141.112,52.873 R53.1@141.112,54.346 ; v1(143.535,52.908) R49.2@143.535,54.346 ; v1(145.974,52.959) R48.1@145.974,54.346 ; v1(148.361,52.908) R45.2@148.361,54.346 ; v1(150.8,52.908) R44.1@150.8,54.346 ; v1(153.203,52.908) 153.213,52.918 R43.2@153.213,54.346 ; v1(155.06,52.873) 154.457,52.27 154.457,48.819 155.128,48.148 R38.2@156.921,48.148 ; R81.2@170.012,8.24 R81.2@170.028,8.255 ; P16.1@170.383,10.389 P16.1@170.409,10.414 ; 183.203,51.924 183.203,53.257 183.464,53.518 183.769,53.518 ; 183.769,57.328 183.769,53.518 ; R54.1@186.617,48.138 187.757,48.138 ; R56.1@189.586,48.138 187.757,48.138 ; 183.769,53.518 184.125,53.518 184.473,53.169 184.473,51.924 186.913,51.924 187.808,51.029 187.808,48.189 187.757,48.138
  Bottom Layer w0.762: R59.1@55.857,5.156 53.873,5.156 53.137,4.42 53.137,2.184 53.975,1.346 65.837,1.346 66.421,1.93 66.421,3.886 66.777,4.242 D9.1@67.945,4.242 ; R9.1@133.223,8.103 135.103,8.103 136.22,6.985 146.863,6.985 147.879,5.969 147.879,2.743 148.819,1.803 156.591,1.803 157.15,2.362 ; P14.1@157.15,10.439 P15.1@157.15,3.988 157.15,2.362 ; P7.1@169.662,64.262 169.662,67.63 170.155,68.123 175.362,68.123 ; P16.1@170.383,10.389 P17.1@170.383,3.962 170.383,1.829 170.358,1.803 ; R34.1@175.346,66.65 175.346,68.108 175.362,68.123 ; R33.1@179.182,66.65 179.182,68.087 179.146,68.123 ; P8.1@179.934,55.448 181.813,57.328 183.769,57.328 186.436,57.328 190.83,61.722 R29.1@190.83,66.65 190.83,67.869 190.576,68.123 186.995,68.123 ; R32.1@183.068,66.65 183.068,68.113 183.058,68.123 ; P18.1@183.667,10.465 183.617,10.414 P19.1@183.617,4.013 181.407,1.803 170.358,1.803 ; R31.1@186.944,66.65 186.944,68.072 186.995,68.123 ; 157.15,2.362 157.709,1.803 170.358,1.803 ; 175.362,68.123 179.146,68.123 ; 179.146,68.123 183.058,68.123 ; 183.058,68.123 186.995,68.123
  Bottom Layer w1.27: P13.4@128.092,62.916 128.092,60.376 133.147,55.321 v3(133.147,54.635) ; v1(130.581,5.131) 130.581,7.874 130.81,8.103 R9.1@133.223,8.103 133.223,12.344 C32.2@134.889,14.011 136.388,14.011 136.896,14.519 C31.1@136.896,15.672 136.961,15.737 U11.3@140.041,15.737 ; R57.1@136.271,54.346 v3(136.271,52.857) 136.271,52.222 141.427,47.066 141.427,38.328 136.957,33.858 v3(136.957,21.057) ; v3(159.142,58.369) 163.769,58.369 P7.1@169.662,64.262 ; R42.1@160.401,56.246 160.401,58.09 ; R54.1@186.607,48.148 R54.1@186.617,48.138
VCC_12V: D11.1 P13.1 P13.2 P13.3 R12.1 | length 132
  Top Layer w0.254: v1(132.461,2.54) 132.461,18.948 v1(132.486,18.974)
  Bottom Layer w0.254: D11.1@73.812,4.242 75.057,5.486 83.261,5.486 86.182,2.565 105.435,2.565 107.036,0.965 130.937,0.965 132.461,2.489 v1(132.461,2.54) ; v1(132.486,18.974) 133.502,19.99 R12.1@133.502,25.578
  Bottom Layer w2.032: P13.1@119.092,62.916 P13.2@122.092,62.916 P13.3@125.092,62.916 125.092,59.667 132.105,52.654 132.105,48.903 133.436,47.573 133.436,25.644 R12.1@133.502,25.578
VCC_24V: C10.1 C11.2 C12.2 C33.2 D5.1 P5.3 R2.1 U3.5 U5.4 U5.8 U10.3 U10.4 | length 63.6
  Top Layer w0.381: D5.1@79.578,4.242 79.654,4.318 79.578,4.394 v1(79.578,6.756)
  Bottom Layer w0.381: v1(79.578,6.756) 79.578,8.052 80.188,8.661
  Bottom Layer w0.762: 56.82,25.781 56.845,25.806 ; U5.4@64.44,27.404 64.44,22.911 65.761,21.59 C33.2@65.761,20.366 ; 82.563,52.781 83.02,52.324 128.321,52.324 129.256,51.389 R2.1@129.256,50.165 ; U3.5@88.544,12.741 C12.2@91.338,12.741
  other v2: 77.216,16.485 79.248,16.485 77.241,18.085 79.223,18.085 52.375,26.121 54.305,26.213 56.439,26.254 51.359,27.635 55.296,27.661 53.289,27.711
pads on no net: J11.4 J11.6 J11.7 J11.8 J11.9 M1.1 M1.2 M2.1 M2.2 U1.1 U1.7 U1.15 U1.26 U1.42 U1.57 U1.58 U1.71 U1.80 U1.83 U1.84 U1.85 U1.88 U6.5 U10.6

## Polygon pours and split planes (outlines as drawn)
GND on Bottom Layer "Keep-Out Layer-No Net" (solid, pour order 46): 99.441,62.484 99.441,63.83 100.119,64.508 103.784,68.174 166.827,68.174 167.615,67.386 167.615,64.16 167.335,63.881 161.239,57.785 137.084,57.785 134.315,57.785 107.365,57.785 99.72,57.785 99.492,58.014 99.441,58.064 99.441,62.469
GND on Bottom Layer "Keep-Out Layer-No Net" (solid, pour order 44): 84.43,17.069 83.795,17.069 82.423,18.44 82.423,20.904 82.702,21.184 83.273,21.754 88.163,21.754 89.701,21.754 89.891,21.565 89.891,19.583 89.814,19.507 86.917,19.507 86.794,19.385 85.954,18.544 85.954,18.313 85.954,17.069 84.455,17.069
BATTIN on Bottom Layer "Keep-Out Layer-No Net" (solid, pour order 40): 83.82,55.855 79.096,55.855 78.791,56.159 78.791,62.469 79.451,63.129 79.695,63.373 82.55,63.373 83.16,63.373 85.979,60.554 85.979,58.826 85.598,58.445 85.344,58.191 84.328,58.191 84.15,58.014 84.15,57.252 84.15,56.185 83.82,55.855
RELAY_IN on Bottom Layer "Keep-Out Layer-No Net" (solid, pour order 38): 56.21,19.765 60.202,19.765 60.554,20.117 60.554,21.133 61.087,21.666 61.189,21.666 57.15,21.666 56.49,21.006 56.21,20.726
RELAY_IN on Bottom Layer "Keep-Out Layer-No Net" (solid, pour order 34): 82.626,28.854 83.134,28.854 83.49,29.21 83.49,34.696 83.769,34.976 83.871,35.077 85.776,35.077 85.979,35.077 86.208,34.849 86.208,33.96 86.436,33.731 86.563,33.604 91.745,33.604 91.923,33.426 91.923,32.512 91.923,31.801 94.259,29.464 98.73,29.464 99.695,28.499 99.695,25.781 99.085,25.171 99.004,25.09 85.065,25.09 84.145,25.09 83.414,24.359 83.287,24.486 82.423,24.486 82.423,28.651 82.626,28.854
NetC13_2 on Bottom Layer "Keep-Out Layer-No Net" (solid, pour order 32): 105.994,14.884 112.116,14.884 112.471,14.529 112.471,11.811 113.36,10.922 128.499,10.922 129.108,10.312 129.261,10.16 129.261,7.722 129.261,5.994 128.575,5.309 124.841,5.309 124.13,6.02 124.13,7.696 123.622,8.204 121.641,8.204 121.056,8.204 120.015,7.163 119.71,6.858 119.71,3.353 119.71,2.134 119.71,2.311 117.678,2.311 115.214,2.311 113.716,3.81 113.716,6.452 112.217,7.95 110.033,7.95 106.909,7.95 105.588,9.271 105.613,9.296 105.613,14.376 105.613,14.503
RELAY_IN on Bottom Layer "Keep-Out Layer-No Net" (solid, pour order 28): 41.732,28.804 41.732,25.806 47.523,20.015 47.773,19.765 53.391,19.765 56.21,19.765 58.496,22.047 57.074,23.47 50.241,23.47 44.907,28.804
VCC_24V on Bottom Layer "Keep-Out Layer-No Net" (solid, pour order 26): 72.542,52.553 71.831,52.553 71.095,53.289 71.095,57.531 71.095,57.785 72.542,59.233 72.542,62.357 71.476,63.424 68.275,63.424 67.843,62.992 67.056,62.205 67.056,61.29 67.056,60.681 64.643,58.268 48.26,41.885 48.26,37.795 58.141,37.795 70.612,50.267 72.542,52.197
RELAY_IN on Bottom Layer "Keep-Out Layer-No Net" (solid, pour order 22): 105.969,60.604 105.969,61.57 105.664,61.874 99.695,61.874 97.663,61.874 96.774,60.985 93.65,60.985 90.272,64.364 86.741,67.894 77.013,67.894 60.477,67.894 46.558,53.975 41.732,49.149 41.732,43.358 41.732,28.804 49.086,21.45 61.557,21.45 61.671,21.565 62.255,22.149 62.255,30.127 62.255,30.178 59.337,30.178 58.699,29.54 58.699,24.613 58.166,24.079 57.988,23.901 56.236,23.901 50.775,23.901 47.574,27.102 47.574,42.494 55.397,50.317 66.065,60.985 66.065,62.89 67.234,64.059 73.609,64.059 83.21,64.059 86.69,60.579 91.719,55.55 98.4,55.55 103.911,55.55 105.969,57.607 105.969,60.579
RELAY_IN on Bottom Layer "Keep-Out Layer-No Net" (solid, pour order 20): 66.573,29.722 66.573,30.204 67.234,30.204 68.91,30.204 69.999,30.204 71.349,28.854 71.78,28.423 74.524,28.423 74.879,28.067 75.108,27.838 75.108,26.314 75.108,25.017 75.944,24.181 78.42,24.181 78.461,24.221 78.969,24.729 78.969,25.375 78.969,27.788 79.477,28.296 79.578,28.397 79.604,28.397 80.061,28.854 82.017,28.854 82.626,28.854 83.033,28.448 83.414,28.067 83.414,24.359 83.414,22.809 81.61,21.006 81.051,20.447 77.851,20.447 73.711,20.447 73,19.736 71.399,19.736 71.298,19.837 71.298,21.565 71.044,21.819 70.866,21.819 69.088,21.819 68.605,21.819 67.488,22.936 66.573,23.851 66.573,26.111
VCC_24V on Bottom Layer "Keep-Out Layer-No Net" (solid, pour order 18): 78.867,19.862 79.909,19.863 80.011,19.862 83.337,16.535 84.963,16.535 85.979,16.535 86.004,16.51 86.055,16.459 86.055,14.935 86.055,14.275 86.893,13.437 87.173,13.437 90.221,13.437 96.672,13.437 99.441,10.668 99.441,6.045 98.908,5.512 98.704,5.309 94.463,5.309 93.218,5.309 91.008,7.518 84.15,7.518 80.975,7.518 73.711,14.783 73.711,18.948 73.711,19.53 74.042,19.862 76.302,19.862 77.368,19.862
VCC_24V on Bottom Layer "Keep-Out Layer-No Net" (solid, pour order 14): 64.846,29.693 66.243,31.09 66.243,31.394 62.916,31.394 62.636,31.115 62.611,31.09 62.408,31.09 62.636,31.09 64.033,29.693 64.846,29.693
VCC_24V on Bottom Layer "Keep-Out Layer-No Net" (solid, pour order 12): 79.23,55.372 80.772,55.372 83.82,55.372 83.922,55.27 83.922,53.627 83.922,48.59 83.845,48.514 82.563,47.231 81.826,47.231 72.479,47.231 72.847,47.6 70.485,45.237 70.485,37.338 70.485,31.699 69.774,30.988 69.664,30.878 60.681,30.878 58.97,30.878 58.369,30.277 57.988,29.896 57.988,25.324 57.988,24.638 57.785,24.435 53.086,24.435 51.486,24.435 48.26,27.661 48.26,37.795 55.067,44.602 61.697,51.232 63.017,52.553 76.733,52.553 78.896,52.553 78.896,55.038
NetD3_2 on Bottom Layer "Keep-Out Layer-No Net" (solid, pour order 8): 86.614,15.685 131.559,15.685 131.801,15.926 131.801,17.868 131.75,17.919 131.635,18.034 125.933,18.034 121.641,18.034 117.653,22.022 114.42,25.254 107.086,25.254 103.524,21.692 96.85,21.692 92.431,17.272 86.614,17.272 86.614,15.685
NetD4_2 on Bottom Layer "Keep-Out Layer-No Net" (solid, pour order 4): 86.436,35.814 86.436,37.286 86.436,37.401 92.443,37.401 92.456,37.414 95.682,40.64 102.204,40.64 104.026,42.461 107.741,46.177 109.626,46.177 109.792,46.177 115.062,46.177 117.627,43.612 122.403,38.837 127.838,38.837 131.191,38.837 131.42,38.608 131.42,36.906 131.115,36.601 131.039,36.525 124.714,36.525 108.001,36.525 107.29,35.814 103.124,35.814 96.317,35.814 92.812,35.814
GND on Top Layer "Keep-Out Layer-No Net" (solid, pour order 42): 2.718,58.242 13.157,68.682 24.308,68.682 85.75,68.682 90.729,63.703 92.812,61.62 97.231,61.62 103.784,68.174 107.874,68.174 187.071,68.174 196.393,58.852 198.476,56.769 198.476,36.754 198.476,13.056 186.792,1.372 186.157,0.737 160.807,0.737 13.843,0.737 2.261,12.319 2.261,57.785 2.718,58.242
RELAY_IN on Top Layer "Keep-Out Layer-No Net" (solid, pour order 36): 71.907,24.435 73.66,24.435 74.117,23.978 74.371,23.724 74.371,21.234 74.371,20.701 74.219,20.549 73.99,20.32 72.454,20.32 72.454,23.406 71.857,24.003 71.907,24.054 71.907,24.435
RELAY_IN on Top Layer "Keep-Out Layer-No Net" (solid, pour order 24): 57.785,24.435 71.907,24.435 72.987,23.355 72.987,21.59 72.987,20.853 72.454,20.32 71.196,20.32 59.258,20.32 57.553,20.32 57.094,20.779 57.094,23.901 57.094,24.206 57.322,24.435
VCC_24V on Top Layer "Keep-Out Layer-No Net" (solid, pour order 16): 48.26,27.661 48.26,28.55 48.285,28.575 48.692,28.981 56.718,28.981 73.939,28.981 76.581,28.981 80.531,25.032 80.531,19.279 80.531,16.066 79.667,15.202 75.273,15.202 74.828,15.646 74.828,20.447 74.828,24.105 73.965,24.968 70.307,24.968 64.948,24.968 50.308,24.968 49.022,26.254 48.26,27.016
NetD3_2 on Top Layer "Keep-Out Layer-No Net" (solid, pour order 6): 86.614,15.621 86.614,17.272 92.431,17.272 95.453,20.295 96.85,21.692 102.667,21.692 103.429,21.692 104.978,23.241 106.909,25.171 109.677,25.171 110.871,23.978 110.871,21.692 110.871,17.272 109.245,15.646 109.22,15.621 86.614,15.621
NetD4_2 on Top Layer "Keep-Out Layer-No Net" (solid, pour order 2): 86.436,35.814 86.436,37.401 86.436,37.363 86.665,37.363 87.96,37.363 89.459,37.363 90.983,37.363 92.431,37.363 95.682,40.64 102.362,40.64 108.56,46.838 110.592,46.838 111.862,45.568 111.862,42.85 111.862,40.996 106.68,35.814 104.953,35.814 100.203,35.814 97.307,35.814 95.301,35.814 94.082,35.814 92.812,35.814

## Keep-outs
Keep-Out Layer:
  lines w1: -0.011,66.952 cw(c2.901,67.086) 3.02,69.999 197.212,70 ; -0.01,2.783 ccw(c2.715,2.737) 2.668,0.012 ; 0,2.774 0,66.952 ; 2.774,0 197.444,0 ; 197.355,70.011 cw(c197.278,67.304) 199.985,67.228 ; 197.434,-0.01 ccw(c197.545,2.445) 200,2.334 ; 200,2.556 200,67.212

## Silkscreen, mask and mechanical layers (free items; w line width, h text height)
Top Overlay:
  text "DC_24V" at 100.178,55.702 h1.02
  text "BooBase" at 147.371,45.136 h1.02
  text "2017.7.28" at 147.269,43.358 h1.02
  text "BABA03A-V2.0.0" at 147.371,41.529 h1.02
  text "+" at 114.097,27.225 h1.02
  text "+" at 93.904,27.113 h1.02
  text "GND" at 167.928,23.114 h1.02
  text "3V3" at 167.97,20.599 h1.02
  text "SWCLK" at 162.922,19.101 h1.02
  text "SWDIO" at 166.04,15.646 h1.02
  text "+" at 133.426,14.336 h1.02
  text "5V" at 68.148,10.058 h1.02
  text "12V" at 73.863,10.058 h1.02
  text "24V" at 79.07,10.058 h1.02
  text "RUN" at 139.395,6.375 h1.02
  text "ERR" at 132.691,5.969 h1.02

## Dimensions
2.774,0 to 3.02,70 on Top Overlay
0,66.952 to 200,67.212 on Top Overlay

## Text inside footprints (layer, text, board x,y; h text height)
C30: Top Overlay "+" at 134.153,11.674 h1.02 r90
J11: Top Overlay "9" at 197.449,36.788 h1.02 r270; Top Overlay "5" at 186.544,38.161 h1.02 r270; Top Overlay "1" at 186.57,26.806 h1.02 r270; Top Overlay "6" at 197.317,28.523 h1.02 r270
P4: Top Overlay "2" at 167.183,44.272 h1.02 r180; Top Overlay "1" at 167.107,41.631 h1.02 r180; Top Overlay "14" at 188.163,44.272 h1.02 r180; Top Overlay "13" at 188.138,41.351 h1.02 r180
Q3: Top Overlay "1" at 62.934,2.266 h1.02; Top Overlay "3" at 62.704,4.676 h1.02